# Altium PCB AX301_AX4010.PcbDoc (part 9 of 10)
Units mil, origin at the board's own origin, x right, y up, seen from the top; angles counter-clockwise.
Board outline 5185 x 3614 mil, 4 copper layers (Top Layer, GND, Mid-Layer 1, Bottom Layer); 191 components, 338 nets, 1108 pads, 420 vias.
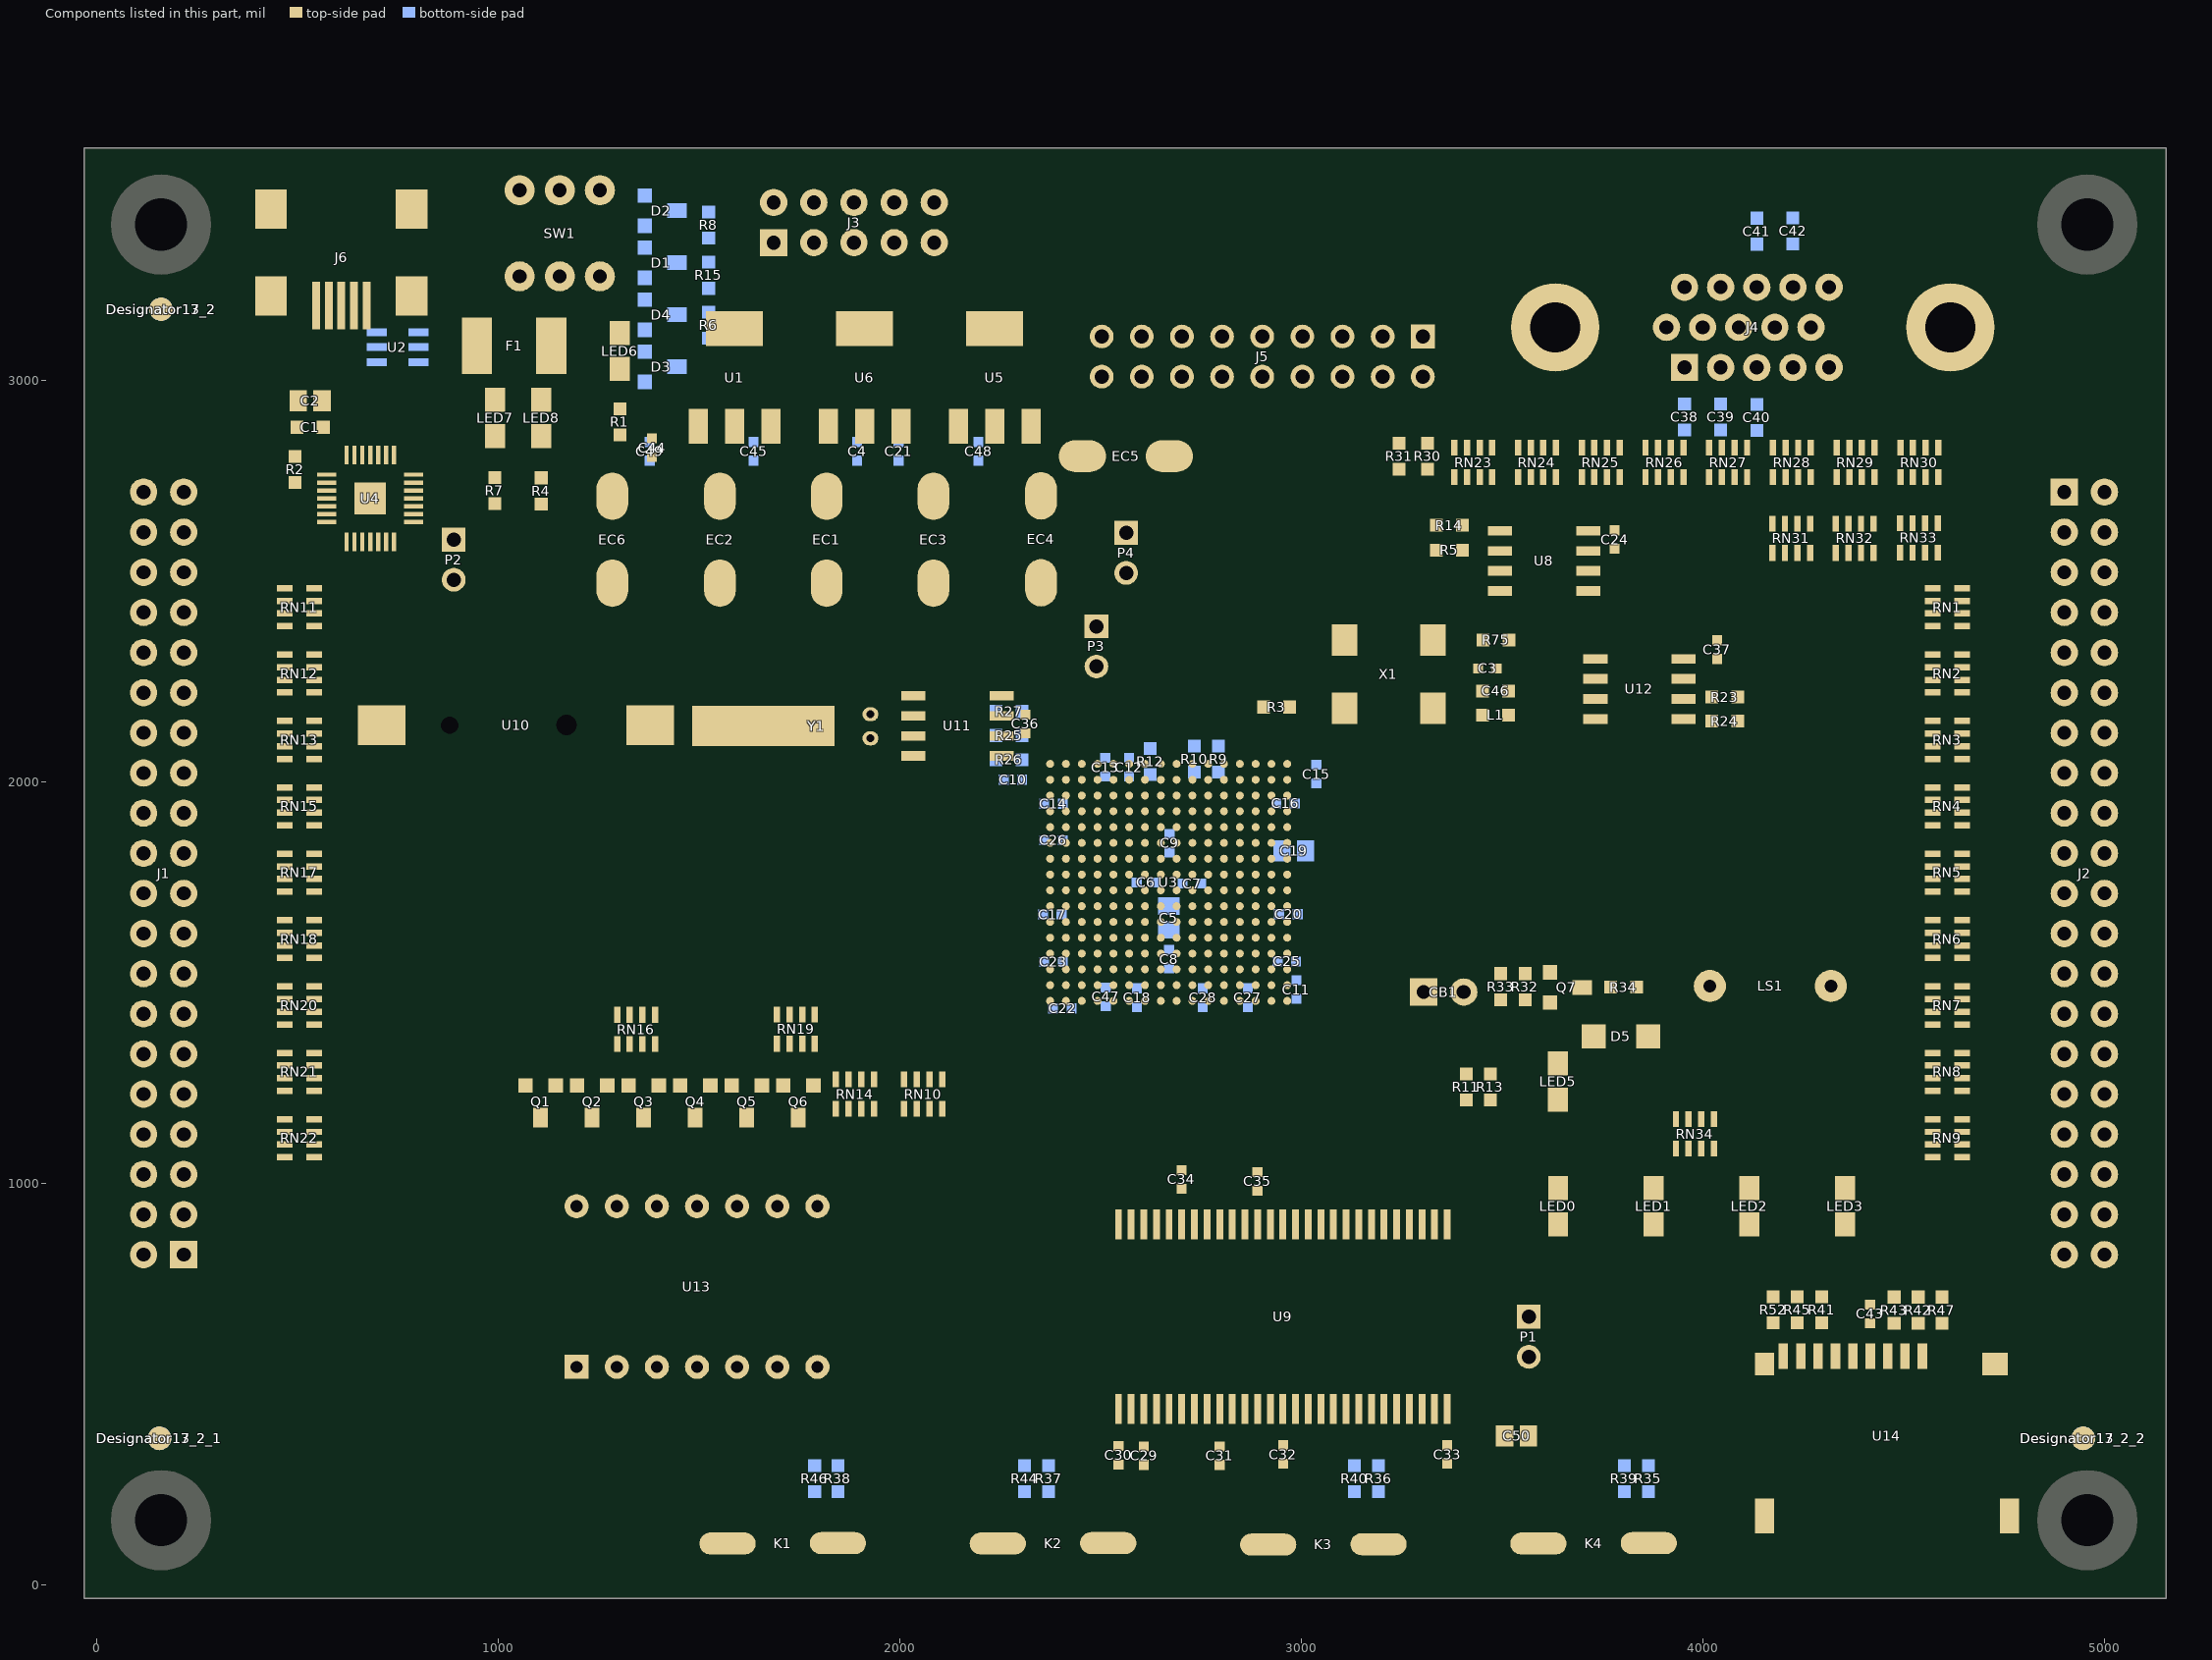
[diagram p11: the components of this part, seen from the top]

## Via types
v1: diameter 20, hole 10, Top Layer to Bottom Layer, 377 vias
v2: diameter 30, hole 15, Top Layer to Bottom Layer, 41 vias
v3: diameter 40, hole 20, Top Layer to Bottom Layer, 2 vias

## Nets (pads, with @x,y where several pads share a name; then routed paths per layer and width w, separated by ;. In a path a pad name is that pad's centre, name@x,y a point inside that pad or via, vN(x,y) a via of type N, cw(c..) or ccw(c..) an arc to the next point about the centre after c; other vN are vias at no path point) (continued)
copper on no net: (continued)
  Top Layer w0.65: 331.6,17.15 1332.82,17.15 ; 331.6,17.8 1332.82,17.8 ; 331.6,18.45 1332.82,18.45 ; 331.6,19.1 1332.82,19.1 ; 331.6,19.75 1332.82,19.75 ; 331.6,20.4 1332.82,20.4 ; 331.6,21.05 1332.82,21.05 ; 331.6,21.7 1332.82,21.7 ; 331.6,22.35 1332.82,22.35 ; 331.6,23 1332.82,23 ; 331.6,23.65 1332.82,23.65 ; 331.6,24.3 1332.82,24.3 ; 331.6,24.95 1332.82,24.95 ; 331.6,25.6 1332.82,25.6 ; 331.6,26.25 1332.82,26.25 ; 331.6,26.9 1332.82,26.9 ; 331.6,27.55 1332.82,27.55 ; 331.6,28.2 1332.82,28.2 ; 331.6,28.85 1332.82,28.85 ; 331.6,29.5 1332.82,29.5 ; 331.6,30.15 1332.82,30.15 ; 331.6,30.8 1332.82,30.8 ; 331.6,31.45 1332.82,31.45 ; 331.6,32.1 1332.82,32.1 ; 331.6,32.75 1332.82,32.75 ; 331.6,33.4 1332.82,33.4 ; 331.6,34.05 1332.82,34.05 ; 331.6,34.7 1332.82,34.7 ; 331.6,35.35 1332.82,35.35 ; 331.6,36 1332.82,36 ; 331.6,36.65 1332.82,36.65 ; 331.6,37.3 1332.82,37.3 ; 331.6,37.95 1332.82,37.95 ; 331.6,38.6 1332.82,38.6 ; 331.6,39.25 1332.82,39.25 ; 331.6,39.9 1332.82,39.9 ; 331.6,40.55 1332.82,40.55 ; 331.6,41.2 1332.82,41.2 ; 331.6,41.85 1332.82,41.85 ; 331.6,42.5 1332.82,42.5 ; 331.6,43.15 1332.82,43.15 ; 331.6,43.8 1332.82,43.8 ; 331.6,44.45 1332.82,44.45 ; 331.6,45.1 1332.82,45.1 ; 331.6,45.75 1332.82,45.75 ; 331.6,46.4 1332.82,46.4 ; 331.6,47.05 1332.82,47.05 ; 331.6,47.7 1332.82,47.7 ; 331.6,48.35 1332.82,48.35 ; 331.6,49 1332.82,49 ; 331.6,49.65 1332.82,49.65 ; 331.6,50.3 1332.82,50.3 ; 331.6,50.95 361.72,50.95 ; 331.6,51.6 361.72,51.6 ; 331.6,52.25 362.37,52.25 ; 331.6,52.9 362.37,52.9 ; 331.6,53.55 363.02,53.55 ; 331.6,54.2 363.02,54.2 ; 331.6,54.85 363.67,54.85 ; 331.6,55.5 363.67,55.5 ; 331.6,56.15 364.32,56.15 ; 331.6,56.8 364.32,56.8 ; 331.6,57.45 364.97,57.45 ; 331.6,58.1 364.97,58.1 ; 331.6,58.75 365.62,58.75 ; 331.6,59.4 366.27,59.4 ; 331.6,60.05 366.27,60.05 ; 331.6,60.7 366.92,60.7 ; 331.6,61.35 366.92,61.35 ; 331.6,62 367.57,62 ; 331.6,62.65 368.22,62.65 ; 331.6,63.3 368.22,63.3 ; 331.6,63.95 368.87,63.95 ; 331.6,64.6 368.87,64.6 ; 331.6,65.25 369.52,65.25 ; 331.6,65.9 370.17,65.9 ; 331.6,66.55 370.17,66.55 ; 331.6,67.2 370.82,67.2 ; 331.6,67.85 371.47,67.85 ; 331.6,68.5 371.47,68.5 ; 331.6,69.15 372.12,69.15 ; 331.6,69.8 372.77,69.8 ; 331.6,70.45 372.77,70.45 ; 331.6,71.1 373.42,71.1 ; 331.6,71.75 374.07,71.75 ; 331.6,72.4 374.72,72.4 ; 331.6,73.05 374.72,73.05 ; 331.6,73.7 375.37,73.7 ; 331.6,74.35 376.02,74.35 ; 331.6,75 376.67,75 ; 331.6,75.65 376.67,75.65 ; 331.6,76.3 377.32,76.3 ; 331.6,76.95 377.97,76.95 ; 331.6,77.6 378.62,77.6 ; 331.6,78.25 379.27,78.25 ; 331.6,78.9 379.27,78.9 ; 331.6,79.55 379.92,79.55 ; 331.6,80.2 380.57,80.2 ; 331.6,80.85 381.22,80.85 ; 331.6,81.5 381.87,81.5 ; 331.6,82.15 382.52,82.15 ; 331.6,82.8 383.17,82.8 ; 331.6,83.45 383.17,83.45 ; 331.6,84.1 383.82,84.1 ; 331.6,84.75 384.47,84.75 ; 331.6,85.4 385.12,85.4 ; 331.6,86.05 385.77,86.05 ; 331.6,86.7 386.42,86.7 ; 331.6,87.35 387.07,87.35 ; 331.6,88 387.72,88 ; 331.6,88.65 388.37,88.65 ; 331.6,89.3 389.02,89.3 ; 331.6,89.95 389.67,89.95 ; 331.6,90.6 390.32,90.6 ; 331.6,91.25 390.97,91.25 ; 331.6,91.9 391.62,91.9 ; 331.6,92.55 392.27,92.55 ; 331.6,93.2 392.92,93.2 ; 331.6,93.85 393.57,93.85 ; 331.6,94.5 394.22,94.5 ; 331.6,95.15 395.52,95.15 ; 331.6,95.8 396.17,95.8 ; 331.6,96.45 396.82,96.45 ; 331.6,97.1 397.47,97.1 ; 331.6,97.75 398.12,97.75 ; 331.6,98.4 399.42,98.4 ; 331.6,99.05 400.07,99.05 ; 331.6,99.7 400.72,99.7 ; 331.6,100.35 401.37,100.35 ; 331.6,101 402.02,101 ; 331.6,101.65 403.32,101.65 ; 331.6,102.3 403.97,102.3 ; 331.6,102.95 405.27,102.95 ; 331.6,103.6 405.92,103.6 ; 331.6,104.25 392.27,104.25 ; 331.6,104.9 392.92,104.9 ; 331.6,105.55 392.92,105.55 ; 331.6,106.2 393.57,106.2 ; 331.6,106.85 394.22,106.85 ; 331.6,107.5 394.22,107.5 ; 331.6,108.15 394.87,108.15 ; 331.6,108.8 394.87,108.8 ; 331.6,109.45 395.52,109.45 ; 331.6,110.1 395.52,110.1 ; 331.6,110.75 396.17,110.75 ; 331.6,111.4 396.17,111.4 ; 331.6,112.05 396.82,112.05 ; 331.6,112.7 397.47,112.7 ; 331.6,113.35 397.47,113.35 ; 331.6,114 398.12,114 ; 331.6,114.65 398.12,114.65 ; 331.6,115.3 398.77,115.3 ; 331.6,115.95 398.77,115.95 ; 331.6,116.6 399.42,116.6 ; 331.6,117.25 400.07,117.25 ; 331.6,117.9 400.07,117.9 ; 331.6,118.55 400.72,118.55 ; 331.6,119.2 400.72,119.2 ; 331.6,119.85 401.37,119.85 ; 331.6,120.5 401.37,120.5 ; 331.6,121.15 402.02,121.15 ; 331.6,121.8 402.67,121.8 ; 331.6,122.45 402.67,122.45 ; 331.6,123.1 403.32,123.1 ; 331.6,123.75 403.32,123.75 ; 331.6,124.4 403.97,124.4 ; 331.6,125.05 403.97,125.05 ; 331.6,125.7 404.62,125.7 ; 331.6,126.35 404.62,126.35 ; 331.6,127 405.27,127 ; 331.6,127.65 405.92,127.65 ; 331.6,128.3 405.92,128.3 ; 331.6,128.95 406.57,128.95 ; 331.6,129.6 406.57,129.6 ; 331.6,130.25 407.22,130.25 ; 331.6,130.9 407.22,130.9 ; 331.6,131.55 407.87,131.55 ; 331.6,132.2 408.52,132.2 ; 331.6,132.85 408.52,132.85 ; 331.6,133.5 409.17,133.5 ; 331.6,134.15 409.17,134.15 ; 331.6,134.8 409.82,134.8 ; 331.6,135.45 409.82,135.45 ; 331.6,136.1 410.47,136.1 ; 331.6,136.75 411.12,136.75 ; 331.6,137.4 411.12,137.4 ; 331.6,138.05 411.77,138.05 ; 331.6,138.7 411.77,138.7 ; 331.6,139.35 412.42,139.35 ; 331.6,140 412.42,140 ; 331.6,140.65 413.07,140.65 ; 331.6,141.3 413.72,141.3 ; 331.6,141.95 413.72,141.95 ; 331.6,142.6 414.37,142.6 ; 331.6,143.25 414.37,143.25 ; 331.6,143.9 415.02,143.9 ; 331.6,144.55 415.02,144.55 ; 331.6,145.2 415.67,145.2 ; 331.6,145.85 415.67,145.85 ; 331.6,146.5 416.32,146.5 ; 331.6,147.15 416.97,147.15 ; 331.6,147.8 416.97,147.8 ; 331.6,148.45 417.62,148.45 ; 331.6,149.1 417.62,149.1 ; 331.6,149.75 418.27,149.75 ; 331.6,150.4 418.27,150.4 ; 331.6,151.05 418.92,151.05 ; 331.6,151.7 419.57,151.7 ; 331.6,152.35 419.57,152.35 ; 331.6,153 420.22,153 ; 331.6,153.65 420.22,153.65 ; 331.6,154.3 420.87,154.3 ; 331.6,154.95 420.87,154.95 ; 331.6,155.6 421.52,155.6 ; 331.6,156.25 422.17,156.25 ; 331.6,156.9 422.17,156.9 ; 331.6,157.55 422.82,157.55 ; 331.6,158.2 422.82,158.2 ; 331.6,158.85 423.47,158.85 ; 331.6,159.5 423.47,159.5 ; 331.6,160.15 424.12,160.15 ; 331.6,160.8 424.12,160.8 ; 331.6,161.45 424.77,161.45 ; 331.6,162.1 425.42,162.1 ; 331.6,162.75 425.42,162.75 ; 331.6,163.4 426.07,163.4 ; 331.6,164.05 426.07,164.05 ; 331.6,164.7 426.72,164.7 ; 331.6,165.35 426.72,165.35 ; 331.6,166 427.37,166 ; 331.6,166.65 428.02,166.65 ; 331.6,167.3 428.02,167.3 ; 331.6,167.95 428.67,167.95 ; 331.6,168.6 428.67,168.6 ; 331.6,169.25 429.32,169.25 ; 331.6,169.9 429.32,169.9 ; 331.6,170.55 429.97,170.55 ; 331.6,171.2 430.62,171.2 ; 331.6,171.85 430.62,171.85 ; 331.6,172.5 431.27,172.5 ; 331.6,173.15 431.27,173.15 ; 331.6,173.8 431.92,173.8 ; 331.6,174.45 431.92,174.45 ; 331.6,175.1 432.57,175.1 ; 331.6,175.75 432.57,175.75 ; 331.6,176.4 433.22,176.4 ; 331.6,177.05 433.87,177.05 ; 331.6,177.7 433.87,177.7 ; 331.6,178.35 434.52,178.35 ; 331.6,179 434.52,179 ; 331.6,179.65 435.17,179.65 ; 331.6,180.3 435.17,180.3 ; 331.6,180.95 435.82,180.95 ; 331.6,181.6 436.47,181.6 ; 331.6,182.25 436.47,182.25 ; 331.6,182.9 437.12,182.9 ; 331.6,183.55 437.12,183.55 ; 331.6,184.2 437.77,184.2 ; 331.6,184.85 437.77,184.85 ; 331.6,185.5 438.42,185.5 ; 331.6,186.15 439.07,186.15 ; 331.6,186.8 439.07,186.8 ; 331.6,187.45 439.72,187.45 ; 331.6,188.1 439.72,188.1 ; 331.6,188.75 440.37,188.75 ; 331.6,189.4 440.37,189.4 ; 331.6,190.05 441.02,190.05 ; 331.6,190.7 441.67,190.7 ; 331.6,191.35 441.67,191.35 ; 331.6,192 442.32,192 ; 331.6,192.65 442.32,192.65 ; 331.6,193.3 442.97,193.3 ; 331.6,193.95 442.97,193.95 ; 331.6,194.6 443.62,194.6 ; 331.6,195.25 443.62,195.25 ; 331.6,195.9 444.27,195.9 ; 331.6,196.55 444.92,196.55 ; 331.6,197.2 444.92,197.2 ; 331.6,197.85 445.57,197.85 ; 331.6,198.5 445.57,198.5 ; 331.6,199.15 446.22,199.15 ; 331.6,199.8 446.22,199.8 ; 331.6,200.45 446.87,200.45 ; 331.6,201.1 447.52,201.1 ; 331.6,201.75 447.52,201.75 ; 331.6,202.4 448.17,202.4 ; 331.6,203.05 448.17,203.05 ; 331.6,203.7 448.82,203.7 ; 331.6,204.35 448.82,204.35 ; 331.6,205 449.47,205 ; 331.6,205.65 450.12,205.65 ; 331.6,206.3 450.12,206.3 ; 331.6,206.95 450.77,206.95 ; 331.6,207.6 450.77,207.6 ; 331.6,208.25 451.42,208.25 ; 331.6,208.9 451.42,208.9 ; 331.6,209.55 452.07,209.55 ; 331.6,210.2 452.07,210.2 ; 331.6,210.85 452.72,210.85 ; 331.6,211.5 453.37,211.5 ; 331.6,212.15 453.37,212.15 ; 331.6,212.8 454.02,212.8 ; 331.6,213.45 454.02,213.45 ; 331.6,214.1 454.67,214.1 ; 331.6,214.75 454.67,214.75 ; 331.6,215.4 455.32,215.4 ; 331.6,216.05 455.97,216.05 ; 331.6,216.7 455.97,216.7 ; 331.6,217.35 456.62,217.35 ; 331.6,218 456.62,218 ; 331.6,218.65 457.27,218.65 ; 331.6,219.3 457.27,219.3 ; 331.6,219.95 457.92,219.95 ; 331.6,220.6 458.57,220.6 ; 331.6,221.25 458.57,221.25 ; 331.6,221.9 459.22,221.9 ; 331.6,222.55 459.22,222.55 ; 331.6,223.2 459.87,223.2 ; 331.6,223.85 1332.82,223.85 ; 331.6,224.5 1332.82,224.5 ; 331.6,225.15 1332.82,225.15 ; 331.6,225.8 1332.82,225.8 ; 331.6,226.45 1332.82,226.45 ; 331.6,227.1 1332.82,227.1 ; 331.6,227.75 1332.82,227.75 ; 331.6,228.4 1332.82,228.4 ; 331.6,229.05 1332.82,229.05 ; 331.6,229.7 1332.82,229.7 ; 331.6,230.35 1332.82,230.35 ; 331.6,231 1332.82,231 ; 331.6,231.65 1332.82,231.65 ; 331.6,232.3 1332.82,232.3 ; 331.6,232.95 1332.82,232.95 ; 331.6,233.6 1332.82,233.6 ; 331.6,234.25 1332.82,234.25 ; 331.6,234.9 1332.82,234.9 ; 331.6,235.55 1332.82,235.55 ; 331.6,236.2 1332.82,236.2 ; 331.6,236.85 1332.82,236.85 ; 331.6,237.5 1332.82,237.5 ; 331.6,238.15 1332.82,238.15 ; 331.6,238.8 1332.82,238.8 ; 331.6,239.45 1332.82,239.45 ; 331.6,240.1 1332.82,240.1 ; 331.6,240.75 1332.82,240.75 ; 331.6,241.4 1332.82,241.4 ; 331.6,242.05 1332.82,242.05 ; 331.6,242.7 1332.82,242.7 ; 331.6,243.35 1332.82,243.35 ; 331.6,244 1332.82,244 ; 331.6,244.65 1332.82,244.65 ; 331.6,245.3 1332.82,245.3 ; 331.6,245.95 1332.82,245.95 ; 331.6,246.6 1332.82,246.6 ; 331.6,247.25 1332.82,247.25 ; 331.6,247.9 1332.82,247.9 ; 393.35,104.25 406.57,104.25 ; 394.65,104.9 407.87,104.9 ; 395.3,105.55 408.52,105.55 ; 395.95,106.2 409.17,106.2 ; 396.6,106.85 410.47,106.85 ; 397.25,107.5 411.77,107.5 ; 397.9,108.15 412.42,108.15 ; 399.2,108.8 413.72,108.8 ; 399.85,109.45 414.37,109.45 ; 400.5,110.1 415.67,110.1 ; 401.15,110.75 416.32,110.75 ; 401.8,111.4 417.62,111.4 ; 403.1,112.05 418.92,112.05 ; 403.75,112.7 420.22,112.7 ; 404.4,113.35 420.87,113.35 ; 405.7,114 422.17,114 ; 406.35,114.65 423.47,114.65 ; 407,115.3 424.77,115.3 ; 408.3,115.95 426.07,115.95 ; 408.95,116.6 427.37,116.6 ; 410.25,117.25 428.67,117.25 ; 410.9,117.9 429.97,117.9 ; 412.2,118.55 431.27,118.55 ; 412.85,119.2 432.57,119.2 ; 414.15,119.85 434.52,119.85 ; 415.45,120.5 435.82,120.5 ; 416.1,121.15 437.77,121.15 ; 417.4,121.8 439.07,121.8 ; 418.7,122.45 441.02,122.45 ; 419.35,123.1 442.97,123.1 ; 420.65,123.75 444.92,123.75 ; 421.3,50.95 491.72,50.95 ; 421.95,51.6 491.72,51.6 ; 421.95,52.25 491.72,52.25 ; 421.95,124.4 446.87,124.4 ; 422.6,52.9 491.72,52.9 ; 423.25,53.55 491.72,53.55 ; 423.25,54.2 491.72,54.2 ; 423.25,125.05 448.82,125.05 ; 423.9,54.85 491.72,54.85 ; 424.55,55.5 491.72,55.5 ; 424.55,56.15 491.72,56.15 ; 424.55,125.7 450.77,125.7 ; 425.2,56.8 491.72,56.8 ; 425.85,57.45 491.72,57.45 ; 425.85,58.1 491.07,58.1 ; 425.85,126.35 453.37,126.35 ; 426.5,58.75 491.07,58.75 ; 427.15,59.4 491.07,59.4 ; 427.15,60.05 491.07,60.05 ; 427.15,127 455.97,127 ; 427.8,60.7 491.07,60.7 ; 428.45,61.35 491.07,61.35 ; 428.45,127.65 458.57,127.65 ; 429.1,62 491.07,62 ; 429.1,62.65 491.07,62.65 ; 429.75,63.3 491.07,63.3 ; 429.75,128.3 461.82,128.3 ; 430.4,63.95 491.07,63.95 ; 431.05,64.6 491.07,64.6 ; 431.05,128.95 465.07,128.95 ; 431.7,65.25 490.42,65.25 ; 431.7,65.9 490.42,65.9 ; 432.35,66.55 490.42,66.55 ; 432.35,129.6 468.97,129.6 ; 433,67.2 490.42,67.2 ; 433.65,67.85 490.42,67.85 ; 433.65,130.25 474.17,130.25 ; 434.3,68.5 490.42,68.5 ; 434.95,69.15 490.42,69.15 ; 435.6,69.8 490.42,69.8 ; 435.6,130.9 485.22,130.9 ; 436.25,70.45 490.42,70.45 ; 436.9,71.1 490.42,71.1 ; 437.55,71.75 490.42,71.75 ; 437.55,131.55 485.22,131.55 ; 438.2,72.4 490.42,72.4 ; 438.85,73.05 489.77,73.05 ; 438.85,132.2 485.22,132.2 ; 439.5,73.7 489.77,73.7 ; 440.15,74.35 489.77,74.35 ; 440.8,75 489.77,75 ; 440.8,132.85 484.57,132.85 ; 441.45,75.65 489.77,75.65 ; 442.1,76.3 489.77,76.3 ; 442.75,76.95 489.77,76.95 ; 442.75,133.5 484.57,133.5 ; 443.4,77.6 489.77,77.6 ; 444.7,78.25 489.77,78.25 ; 444.7,134.15 484.57,134.15 ; 445.35,78.9 489.77,78.9 ; 446,79.55 489.77,79.55 ; 446.65,80.2 489.12,80.2 ; 446.65,134.8 484.57,134.8 ; 447.3,80.85 489.12,80.85 ; 448.6,81.5 489.12,81.5 ; 448.6,135.45 484.57,135.45 ; 449.25,82.15 489.12,82.15 ; 450.55,82.8 489.12,82.8 ; 451.2,83.45 489.12,83.45 ; 451.2,136.1 484.57,136.1 ; 451.85,84.1 489.12,84.1 ; 453.15,84.75 489.12,84.75 ; 453.15,136.75 484.57,136.75 ; 453.8,85.4 489.12,85.4 ; 455.1,86.05 489.12,86.05 ; 455.75,86.7 489.12,86.7 ; 456.4,137.4 484.57,137.4 ; 457.05,87.35 488.47,87.35 ; 458.35,88 488.47,88 ; 459,88.65 488.47,88.65 ; 459,138.05 484.57,138.05 ; 460.3,89.3 488.47,89.3 ; 461.6,89.95 488.47,89.95 ; 461.6,138.7 484.57,138.7 ; 462.25,90.6 488.47,90.6 ; 462.9,139.35 484.57,139.35 ; 463.55,91.25 488.47,91.25 ; 463.55,140 483.92,140 ; 463.55,140.65 483.92,140.65 ; 464.2,141.3 483.92,141.3 ; 464.2,141.95 483.92,141.95 ; 464.85,91.9 488.47,91.9 ; 464.85,142.6 483.92,142.6 ; 464.85,143.25 483.92,143.25 ; 465.5,143.9 483.92,143.9 ; 465.5,144.55 483.92,144.55 ; 465.5,145.2 483.92,145.2 ; 466.15,92.55 488.47,92.55 ; 466.15,145.85 483.92,145.85 ; 466.15,146.5 483.92,146.5 ; 466.8,147.15 483.92,147.15 ; 466.8,147.8 483.27,147.8 ; 467.45,93.2 488.47,93.2 ; 467.45,148.45 483.27,148.45 ; 467.45,149.1 483.27,149.1 ; 468.1,149.75 483.27,149.75 ; 468.1,150.4 483.27,150.4 ; 468.75,93.85 488.47,93.85 ; 468.75,151.05 483.27,151.05 ; 468.75,151.7 483.27,151.7 ; 469.4,152.35 483.27,152.35 ; 469.4,153 483.27,153 ; 470.05,94.5 488.47,94.5 ; 470.05,153.65 483.27,153.65 ; 470.05,154.3 483.27,154.3 ; 470.7,154.95 483.27,154.95 ; 470.7,155.6 482.62,155.6 ; 470.7,156.25 482.62,156.25 ; 471.35,95.15 487.82,95.15 ; 471.35,156.9 482.62,156.9 ; 471.35,157.55 482.62,157.55 ; 472,158.2 482.62,158.2 ; 472,158.85 482.62,158.85 ; 472.65,159.5 482.62,159.5 ; 472.65,160.15 482.62,160.15 ; 473.3,95.8 487.82,95.8 ; 473.3,160.8 482.62,160.8 ; 473.3,161.45 482.62,161.45 ; 473.95,162.1 482.62,162.1 ; 473.95,162.75 482.62,162.75 ; 474.6,163.4 481.97,163.4 ; 474.6,164.05 481.97,164.05 ; 475.25,96.45 487.82,96.45 ; 475.25,164.7 481.97,164.7 ; 475.25,165.35 481.97,165.35 ; 475.9,166 481.97,166 ; 475.9,166.65 481.97,166.65 ; 476.55,97.1 487.82,97.1 ; 476.55,167.3 481.97,167.3 ; 476.55,167.95 481.97,167.95 ; 476.55,168.6 481.97,168.6 ; 477.2,169.25 481.97,169.25 ; 477.2,169.9 481.97,169.9 ; 477.85,170.55 481.97,170.55 ; 477.85,171.2 481.32,171.2 ; 478.5,97.75 487.82,97.75 ; 478.5,171.85 481.32,171.85 ; 478.5,172.5 481.32,172.5 ; 479.15,173.15 481.32,173.15 ; 479.15,173.8 481.32,173.8 ; 479.8,126.35 485.22,126.35 ; 479.8,127 485.22,127 ; 479.8,127.65 485.22,127.65 ; 479.8,128.3 485.22,128.3 ; 479.8,128.95 485.22,128.95 ; 479.8,129.6 485.22,129.6 ; 479.8,130.25 485.22,130.25 ; 479.8,174.45 481.32,174.45 ; 479.8,175.1 481.32,175.1 ; 480.45,98.4 487.82,98.4 ; 480.45,117.9 485.87,117.9 ; 480.45,118.55 485.87,118.55 ; 480.45,119.2 485.87,119.2 ; 480.45,119.85 485.87,119.85 ; 480.45,120.5 485.87,120.5 ; 480.45,121.15 485.87,121.15 ; 480.45,121.8 485.87,121.8 ; 480.45,122.45 485.87,122.45 ; 480.45,123.1 485.87,123.1 ; 480.45,123.75 485.87,123.75 ; 480.45,124.4 485.87,124.4 ; 480.45,125.05 485.22,125.05 ; 480.45,125.7 485.22,125.7 ; 480.45,175.75 481.32,175.75 ; 480.45,176.4 481.32,176.4 ; 481.1,109.45 487.17,109.45 ; 481.1,110.1 486.52,110.1 ; 481.1,110.75 486.52,110.75 ; 481.1,111.4 486.52,111.4 ; 481.1,112.05 486.52,112.05 ; 481.1,112.7 486.52,112.7 ; 481.1,113.35 486.52,113.35 ; 481.1,114 486.52,114 ; 481.1,114.65 486.52,114.65 ; 481.1,115.3 486.52,115.3 ; 481.1,115.95 486.52,115.95 ; 481.1,116.6 486.52,116.6 ; 481.1,117.25 485.87,117.25 ; 481.1,177.05 481.32,177.05 ; 481.1,177.7 481.32,177.7 ; 481.75,100.35 487.82,100.35 ; 481.75,101 487.82,101 ; 481.75,101.65 487.82,101.65 ; 481.75,102.3 487.17,102.3 ; 481.75,102.95 487.17,102.95 ; 481.75,103.6 487.17,103.6 ; 481.75,104.25 487.17,104.25 ; 481.75,104.9 487.17,104.9 ; 481.75,105.55 487.17,105.55 ; 481.75,106.2 487.17,106.2 ; 481.75,106.85 487.17,106.85 ; 481.75,107.5 487.17,107.5 ; 481.75,108.15 487.17,108.15 ; 481.75,108.8 487.17,108.8 ; 482.4,99.05 487.82,99.05 ; 482.4,99.7 487.82,99.7 ; 518.15,221.25 616.52,221.25 ; 518.15,221.9 616.52,221.9 ; 518.15,222.55 616.52,222.55 ; 518.15,223.2 617.17,223.2 ; 518.8,217.35 615.87,217.35 ; 518.8,218 615.87,218 ; 518.8,218.65 615.87,218.65 ; 518.8,219.3 615.87,219.3 ; 518.8,219.95 616.52,219.95 ; 518.8,220.6 616.52,220.6 ; 519.45,212.8 614.57,212.8 ; 519.45,213.45 614.57,213.45 ; 519.45,214.1 615.22,214.1 ; 519.45,214.75 615.22,214.75 ; 519.45,215.4 615.22,215.4 ; 519.45,216.05 615.22,216.05 ; 519.45,216.7 615.22,216.7 ; 520.1,208.9 613.92,208.9 ; 520.1,209.55 613.92,209.55 ; 520.1,210.2 613.92,210.2 ; 520.1,210.85 614.57,210.85 ; 520.1,211.5 614.57,211.5 ; 520.1,212.15 614.57,212.15 ; 520.75,205 613.27,205 ; 520.75,205.65 613.27,205.65 ; 520.75,206.3 613.27,206.3 ; 520.75,206.95 613.27,206.95 ; 520.75,207.6 613.27,207.6 ; 520.75,208.25 613.92,208.25 ; 521.4,201.1 611.97,201.1 ; 521.4,201.75 612.62,201.75 ; 521.4,202.4 612.62,202.4 ; 521.4,203.05 612.62,203.05 ; 521.4,203.7 612.62,203.7 ; 521.4,204.35 612.62,204.35 ; 522.05,196.55 611.32,196.55 ; 522.05,197.2 611.32,197.2 ; 522.05,197.85 611.32,197.85 ; 522.05,198.5 611.32,198.5 ; 522.05,199.15 611.97,199.15 ; 522.05,199.8 611.97,199.8 ; 522.05,200.45 611.97,200.45 ; 522.7,192.65 610.67,192.65 ; 522.7,193.3 610.67,193.3 ; 522.7,193.95 610.67,193.95 ; 522.7,194.6 610.67,194.6 ; 522.7,195.25 610.67,195.25 ; 522.7,195.9 611.32,195.9 ; 523.35,188.75 609.37,188.75 ; 523.35,189.4 610.02,189.4 ; 523.35,190.05 610.02,190.05 ; 523.35,190.7 610.02,190.7 ; 523.35,191.35 610.02,191.35 ; 523.35,192 610.02,192 ; 524,184.2 608.72,184.2 ; 524,184.85 608.72,184.85 ; 524,185.5 608.72,185.5 ; 524,186.15 608.72,186.15 ; 524,186.8 609.37,186.8 ; 524,187.45 609.37,187.45 ; 524,188.1 609.37,188.1 ; 524.65,180.3 608.07,180.3 ; 524.65,180.95 608.07,180.95 ; 524.65,181.6 608.07,181.6 ; 524.65,182.25 608.07,182.25 ; 524.65,182.9 608.07,182.9 ; 524.65,183.55 608.72,183.55 ; 525.3,176.4 606.77,176.4 ; 525.3,177.05 606.77,177.05 ; 525.3,177.7 607.42,177.7 ; 525.3,178.35 607.42,178.35 ; 525.3,179 607.42,179 ; 525.3,179.65 607.42,179.65 ; 525.95,172.5 606.12,172.5 ; 525.95,173.15 606.12,173.15 ; 525.95,173.8 606.12,173.8 ; 525.95,174.45 606.77,174.45 ; 525.95,175.1 606.77,175.1 ; 525.95,175.75 606.77,175.75 ; 526.6,167.95 605.47,167.95 ; 526.6,168.6 605.47,168.6 ; 526.6,169.25 605.47,169.25 ; 526.6,169.9 605.47,169.9 ; 526.6,170.55 605.47,170.55 ; 526.6,171.2 606.12,171.2 ; 526.6,171.85 606.12,171.85 ; 527.25,164.05 604.17,164.05 ; 527.25,164.7 604.17,164.7 ; 527.25,165.35 604.82,165.35 ; 527.25,166 604.82,166 ; 527.25,166.65 604.82,166.65 ; 527.25,167.3 604.82,167.3 ; 527.9,160.15 603.52,160.15 ; 527.9,160.8 603.52,160.8 ; 527.9,161.45 603.52,161.45 ; 527.9,162.1 604.17,162.1 ; 527.9,162.75 604.17,162.75 ; 527.9,163.4 604.17,163.4 ; 528.55,156.25 602.87,156.25 ; 528.55,156.9 602.87,156.9 ; 528.55,157.55 602.87,157.55 ; 528.55,158.2 602.87,158.2 ; 528.55,158.85 603.52,158.85 ; 528.55,159.5 603.52,159.5 ; 529.2,151.7 601.57,151.7 ; 529.2,152.35 601.57,152.35 ; 529.2,153 602.22,153 ; 529.2,153.65 602.22,153.65 ; 529.2,154.3 602.22,154.3 ; 529.2,154.95 602.22,154.95 ; 529.2,155.6 602.22,155.6 ; 529.85,147.8 600.92,147.8 ; 529.85,148.45 600.92,148.45 ; 529.85,149.1 600.92,149.1 ; 529.85,149.75 601.57,149.75 ; 529.85,150.4 601.57,150.4 ; 529.85,151.05 601.57,151.05 ; 530.5,143.9 600.27,143.9 ; 530.5,144.55 600.27,144.55 ; 530.5,145.2 600.27,145.2 ; 530.5,145.85 600.27,145.85 ; 530.5,146.5 600.27,146.5 ; 530.5,147.15 600.92,147.15 ; 531.15,139.35 598.97,139.35 ; 531.15,140 598.97,140 ; 531.15,140.65 599.62,140.65 ; 531.15,141.3 599.62,141.3 ; 531.15,141.95 599.62,141.95 ; 531.15,142.6 599.62,142.6 ; 531.15,143.25 599.62,143.25 ; 531.8,135.45 598.32,135.45 ; 531.8,136.1 598.32,136.1 ; 531.8,136.75 598.32,136.75 ; 531.8,137.4 598.97,137.4 ; 531.8,138.05 598.97,138.05 ; 531.8,138.7 598.97,138.7 ; 532.45,131.55 597.67,131.55 ; 532.45,132.2 597.67,132.2 ; 532.45,132.85 597.67,132.85 ; 532.45,133.5 597.67,133.5 ; 532.45,134.15 597.67,134.15 ; 532.45,134.8 598.32,134.8 ; 533.1,127.65 596.37,127.65 ; 533.1,128.3 597.02,128.3 ; 533.1,128.95 597.02,128.95 ; 533.1,129.6 597.02,129.6 ; 533.1,130.25 597.02,130.25 ; 533.1,130.9 597.02,130.9 ; 533.75,123.1 595.72,123.1 ; 533.75,123.75 595.72,123.75 ; 533.75,124.4 595.72,124.4 ; 533.75,125.05 595.72,125.05 ; 533.75,125.7 596.37,125.7 ; 533.75,126.35 596.37,126.35 ; 533.75,127 596.37,127 ; 534.4,119.2 595.07,119.2 ; 534.4,119.85 595.07,119.85 ; 534.4,120.5 595.07,120.5 ; 534.4,121.15 595.07,121.15 ; 534.4,121.8 595.07,121.8 ; 534.4,122.45 595.72,122.45 ; 535.05,115.3 593.77,115.3 ; 535.05,115.95 594.42,115.95 ; 535.05,116.6 594.42,116.6 ; 535.05,117.25 594.42,117.25 ; 535.05,117.9 594.42,117.9 ; 535.05,118.55 594.42,118.55 ; 535.7,110.75 593.12,110.75 ; 535.7,111.4 593.12,111.4 ; 535.7,112.05 593.12,112.05 ; 535.7,112.7 593.12,112.7 ; 535.7,113.35 593.77,113.35 ; 535.7,114 593.77,114 ; 535.7,114.65 593.77,114.65 ; 536.35,106.85 592.47,106.85 ; 536.35,107.5 592.47,107.5 ; 536.35,108.15 592.47,108.15 ; 536.35,108.8 592.47,108.8 ; 536.35,109.45 592.47,109.45 ; 536.35,110.1 593.12,110.1 ; 537,102.95 591.17,102.95 ; 537,103.6 591.17,103.6 ; 537,104.25 591.82,104.25 ; 537,104.9 591.82,104.9 ; 537,105.55 591.82,105.55 ; 537,106.2 591.82,106.2 ; 537.65,99.05 590.52,99.05 ; 537.65,99.7 590.52,99.7 ; 537.65,100.35 590.52,100.35 ; 537.65,101 591.17,101 ; 537.65,101.65 591.17,101.65 ; 537.65,102.3 591.17,102.3 ; 538.3,94.5 589.87,94.5 ; 538.3,95.15 589.87,95.15 ; 538.3,95.8 589.87,95.8 ; 538.3,96.45 589.87,96.45 ; 538.3,97.1 589.87,97.1 ; 538.3,97.75 590.52,97.75 ; 538.3,98.4 590.52,98.4 ; 538.95,90.6 588.57,90.6 ; 538.95,91.25 588.57,91.25 ; 538.95,91.9 589.22,91.9 ; 538.95,92.55 589.22,92.55 ; 538.95,93.2 589.22,93.2 ; 538.95,93.85 589.22,93.85 ; 539.6,86.7 587.92,86.7 ; 539.6,87.35 587.92,87.35 ; 539.6,88 587.92,88 ; 539.6,88.65 588.57,88.65 ; 539.6,89.3 588.57,89.3 ; 539.6,89.95 588.57,89.95 ; 540.25,82.8 587.27,82.8 ; 540.25,83.45 587.27,83.45 ; 540.25,84.1 587.27,84.1 ; 540.25,84.75 587.27,84.75 ; 540.25,85.4 587.92,85.4 ; 540.25,86.05 587.92,86.05 ; 540.9,78.25 585.97,78.25 ; 540.9,78.9 585.97,78.9 ; 540.9,79.55 586.62,79.55 ; 540.9,80.2 586.62,80.2 ; 540.9,80.85 586.62,80.85 ; 540.9,81.5 586.62,81.5 ; 540.9,82.15 586.62,82.15 ; 541.55,74.35 585.32,74.35 ; 541.55,75 585.32,75 ; 541.55,75.65 585.32,75.65 ; 541.55,76.3 585.97,76.3 ; 541.55,76.95 585.97,76.95 ; 541.55,77.6 585.97,77.6 ; 542.2,70.45 584.67,70.45 ; 542.2,71.1 584.67,71.1 ; 542.2,71.75 584.67,71.75 ; 542.2,72.4 584.67,72.4 ; 542.2,73.05 584.67,73.05 ; 542.2,73.7 585.32,73.7 ; 542.85,65.9 583.37,65.9 ; 542.85,66.55 583.37,66.55 ; 542.85,67.2 584.02,67.2 ; 542.85,67.85 584.02,67.85 ; 542.85,68.5 584.02,68.5 ; 542.85,69.15 584.02,69.15 ; 542.85,69.8 584.02,69.8 ; 543.5,62 582.72,62 ; 543.5,62.65 582.72,62.65 ; 543.5,63.3 582.72,63.3 ; 543.5,63.95 583.37,63.95 ; 543.5,64.6 583.37,64.6 ; 543.5,65.25 583.37,65.25 ; 544.15,58.1 582.07,58.1 ; 544.15,58.75 582.07,58.75 ; 544.15,59.4 582.07,59.4 ; 544.15,60.05 582.07,60.05 ; 544.15,60.7 582.07,60.7 ; 544.15,61.35 582.72,61.35 ; 544.8,54.2 580.77,54.2 ; 544.8,54.85 581.42,54.85 ; 544.8,55.5 581.42,55.5 ; 544.8,56.15 581.42,56.15 ; 544.8,56.8 581.42,56.8 ; 544.8,57.45 581.42,57.45 ; 545.45,50.95 580.12,50.95 ; 545.45,51.6 580.12,51.6 ; 545.45,52.25 580.77,52.25 ; 545.45,52.9 580.77,52.9 ; 545.45,53.55 580.77,53.55 ; 644.25,93.2 769.27,93.2 ; 644.25,93.85 769.27,93.85 ; 644.25,94.5 769.27,94.5 ; 644.25,95.15 769.92,95.15 ; 644.25,95.8 769.92,95.8 ; 644.9,96.45 769.92,96.45 ; 644.9,97.1 769.92,97.1 ; 644.9,97.75 769.92,97.75 ; 644.9,98.4 770.57,98.4 ; 645.55,99.05 770.57,99.05 ; 645.55,99.7 770.57,99.7 ; 645.55,100.35 770.57,100.35 ; 645.55,101 770.57,101 ; 645.55,101.65 771.22,101.65 ; 646.2,102.3 771.22,102.3 ; 646.2,102.95 771.22,102.95 ; 646.2,103.6 771.22,103.6 ; 646.2,104.25 771.87,104.25 ; 646.2,104.9 771.87,104.9 ; 646.85,105.55 771.87,105.55 ; 646.85,106.2 771.87,106.2 ; 646.85,106.85 771.87,106.85 ; 646.85,107.5 772.52,107.5 ; 647.5,108.15 772.52,108.15 ; 647.5,108.8 772.52,108.8 ; 647.5,109.45 772.52,109.45 ; 647.5,110.1 772.52,110.1 ; 647.5,110.75 773.17,110.75 ; 648.15,111.4 773.17,111.4 ; 648.15,112.05 773.17,112.05 ; 648.15,112.7 773.17,112.7 ; 648.15,113.35 773.82,113.35 ; 648.15,114 773.82,114 ; 648.8,114.65 773.82,114.65 ; 648.8,115.3 773.82,115.3 ; 648.8,115.95 773.82,115.95 ; 648.8,116.6 774.47,116.6 ; 649.45,117.25 774.47,117.25 ; 649.45,117.9 774.47,117.9 ; 649.45,118.55 774.47,118.55 ; 649.45,119.2 775.12,119.2 ; 649.45,119.85 775.12,119.85 ; 650.1,120.5 775.12,120.5 ; 650.1,121.15 775.12,121.15 ; 650.1,121.8 775.12,121.8 ; 650.1,122.45 775.77,122.45 ; 650.75,123.1 775.77,123.1 ; 650.75,123.75 775.77,123.75 ; 650.75,124.4 775.77,124.4 ; 650.75,125.05 775.77,125.05 ; 650.75,125.7 776.42,125.7 ; 651.4,126.35 776.42,126.35 ; 651.4,127 776.42,127 ; 651.4,127.65 776.42,127.65 ; 651.4,128.3 777.07,128.3 ; 651.4,128.95 777.07,128.95 ; 652.05,129.6 777.07,129.6 ; 652.05,130.25 777.07,130.25 ; 652.05,130.9 777.07,130.9 ; 652.05,131.55 777.72,131.55 ; 652.7,132.2 777.72,132.2 ; 652.7,132.85 777.72,132.85 ; 652.7,133.5 777.72,133.5 ; 652.7,134.15 777.72,134.15 ; 652.7,134.8 778.37,134.8 ; 653.35,135.45 778.37,135.45 ; 653.35,136.1 778.37,136.1 ; 653.35,136.75 778.37,136.75 ; 653.35,137.4 779.02,137.4 ; 653.35,138.05 779.02,138.05 ; 654,138.7 779.02,138.7 ; 654,139.35 779.02,139.35 ; 654,140 779.02,140 ; 654,140.65 779.67,140.65 ; 654.65,141.3 779.67,141.3 ; 654.65,141.95 779.67,141.95 ; 654.65,142.6 779.67,142.6 ; 654.65,143.25 779.67,143.25 ; 654.65,143.9 780.32,143.9 ; 655.3,144.55 780.32,144.55 ; 655.3,145.2 780.32,145.2 ; 655.3,145.85 780.32,145.85 ; 655.3,146.5 780.97,146.5 ; 655.3,147.15 780.97,147.15 ; 655.95,147.8 780.97,147.8 ; 655.95,148.45 780.97,148.45 ; 655.95,149.1 780.97,149.1 ; 655.95,149.75 781.62,149.75 ; 656.6,150.4 781.62,150.4 ; 656.6,151.05 781.62,151.05 ; 656.6,151.7 781.62,151.7 ; 656.6,152.35 781.62,152.35 ; 656.6,153 782.27,153 ; 657.25,153.65 782.27,153.65 ; 657.25,154.3 782.27,154.3 ; 657.25,154.95 782.27,154.95 ; 657.25,155.6 782.92,155.6 ; 657.25,156.25 782.92,156.25 ; 657.9,156.9 782.92,156.9 ; 657.9,157.55 782.92,157.55 ; 657.9,158.2 782.92,158.2 ; 657.9,158.85 783.57,158.85 ; 658.55,159.5 783.57,159.5 ; 658.55,160.15 783.57,160.15 ; 658.55,160.8 783.57,160.8 ; 658.55,161.45 783.57,161.45 ; 658.55,162.1 784.22,162.1 ; 659.2,162.75 784.22,162.75 ; 659.2,163.4 784.22,163.4 ; 659.2,164.05 784.22,164.05 ; 659.2,164.7 784.87,164.7 ; 659.2,165.35 784.87,165.35 ; 659.85,166 784.87,166 ; 659.85,166.65 784.87,166.65 ; 659.85,167.3 784.87,167.3 ; 659.85,167.95 785.52,167.95 ; 660.5,168.6 785.52,168.6 ; 660.5,169.25 785.52,169.25 ; 660.5,169.9 785.52,169.9 ; 660.5,170.55 785.52,170.55 ; 660.5,171.2 786.17,171.2 ; 661.15,171.85 786.17,171.85 ; 661.15,172.5 786.17,172.5 ; 661.15,173.15 786.17,173.15 ; 661.15,173.8 786.82,173.8 ; 661.8,174.45 786.82,174.45 ; 661.8,175.1 786.82,175.1 ; 661.8,175.75 786.82,175.75 ; 661.8,176.4 786.82,176.4 ; 661.8,177.05 787.47,177.05 ; 662.45,177.7 787.47,177.7 ; 662.45,178.35 787.47,178.35 ; 662.45,179 787.47,179 ; 662.45,179.65 787.47,179.65 ; 662.45,180.3 788.12,180.3 ; 663.1,180.95 788.12,180.95 ; 663.1,181.6 788.12,181.6 ; 663.1,182.25 788.12,182.25 ; 663.1,182.9 788.77,182.9 ; 663.75,183.55 788.77,183.55 ; 663.75,184.2 788.77,184.2 ; 663.75,184.85 788.77,184.85 ; 663.75,185.5 788.77,185.5 ; 663.75,186.15 789.42,186.15 ; 664.4,186.8 789.42,186.8 ; 664.4,187.45 789.42,187.45 ; 664.4,188.1 789.42,188.1 ; 664.4,188.75 789.42,188.75 ; 664.4,189.4 790.07,189.4 ; 665.05,190.05 790.07,190.05 ; 665.05,190.7 790.07,190.7 ; 665.05,191.35 790.07,191.35 ; 665.05,192 790.72,192 ; 665.7,192.65 790.72,192.65 ; 665.7,193.3 790.72,193.3 ; 665.7,193.95 790.72,193.95 ; 665.7,194.6 790.72,194.6 ; 665.7,195.25 791.37,195.25 ; 666.35,195.9 791.37,195.9 ; 666.35,196.55 791.37,196.55 ; 666.35,197.2 791.37,197.2 ; 666.35,197.85 791.37,197.85 ; 666.35,198.5 792.02,198.5 ; 667,199.15 792.02,199.15 ; 667,199.8 792.02,199.8 ; 667,200.45 792.02,200.45 ; 667,201.1 792.67,201.1 ; 667.65,201.75 792.67,201.75 ; 667.65,202.4 792.67,202.4 ; 667.65,203.05 792.67,203.05 ; 667.65,203.7 792.67,203.7 ; 667.65,204.35 793.32,204.35 ; 668.3,205 793.32,205 ; 668.3,205.65 793.32,205.65 ; 668.3,206.3 793.32,206.3 ; 668.3,206.95 793.32,206.95 ; 668.3,207.6 793.97,207.6 ; 668.95,208.25 793.97,208.25 ; 668.95,208.9 793.97,208.9 ; 668.95,209.55 793.97,209.55 ; 668.95,210.2 794.62,210.2 ; 669.6,210.85 794.62,210.85 ; 669.6,211.5 794.62,211.5 ; 669.6,212.15 794.62,212.15 ; 669.6,212.8 794.62,212.8 ; 669.6,213.45 795.27,213.45 ; 670.25,214.1 795.27,214.1 ; 670.25,214.75 795.27,214.75 ; 670.25,215.4 795.27,215.4 ; 670.25,216.05 795.27,216.05 ; 670.25,216.7 795.92,216.7 ; 670.9,217.35 795.92,217.35 ; 670.9,218 795.92,218 ; 670.9,218.65 795.92,218.65 ; 670.9,219.3 796.57,219.3 ; 671.55,219.95 796.57,219.95 ; 671.55,220.6 796.57,220.6 ; 671.55,221.25 796.57,221.25 ; 671.55,221.9 796.57,221.9 ; 671.55,222.55 797.22,222.55 ; 672.2,223.2 797.22,223.2 ; 720.95,50.95 760.17,50.95 ; 720.95,51.6 760.17,51.6 ; 721.6,52.25 760.17,52.25 ; 721.6,52.9 760.82,52.9 ; 721.6,53.55 760.82,53.55 ; 721.6,54.2 760.82,54.2 ; 721.6,54.85 760.82,54.85 ; 722.25,55.5 760.82,55.5 ; 722.25,56.15 761.47,56.15 ; 722.25,56.8 761.47,56.8 ; 722.25,57.45 761.47,57.45 ; 722.25,58.1 761.47,58.1 ; 722.9,58.75 762.12,58.75 ; 722.9,59.4 762.12,59.4 ; 722.9,60.05 762.12,60.05 ; 722.9,60.7 762.12,60.7 ; 722.9,61.35 762.12,61.35 ; 723.55,62 762.77,62 ; 723.55,62.65 762.77,62.65 ; 723.55,63.3 762.77,63.3 ; 723.55,63.95 762.77,63.95 ; 724.2,64.6 762.77,64.6 ; 724.2,65.25 763.42,65.25 ; 724.2,65.9 763.42,65.9 ; 724.2,66.55 763.42,66.55 ; 724.2,67.2 763.42,67.2 ; 724.85,67.85 764.07,67.85 ; 724.85,68.5 764.07,68.5 ; 724.85,69.15 764.07,69.15 ; 724.85,69.8 764.07,69.8 ; 724.85,70.45 764.07,70.45 ; 725.5,71.1 764.72,71.1 ; 725.5,71.75 764.72,71.75 ; 725.5,72.4 764.72,72.4 ; 725.5,73.05 764.72,73.05 ; 725.5,73.7 764.72,73.7 ; 726.15,74.35 765.37,74.35 ; 726.15,75 765.37,75 ; 726.15,75.65 765.37,75.65 ; 726.15,76.3 765.37,76.3 ; 726.15,76.95 766.02,76.95 ; 726.8,77.6 766.02,77.6 ; 726.8,78.25 766.02,78.25 ; 726.8,78.9 766.02,78.9 ; 726.8,79.55 766.02,79.55 ; 727.45,80.2 766.67,80.2 ; 727.45,80.85 766.67,80.85 ; 727.45,81.5 766.67,81.5 ; 727.45,82.15 766.67,82.15 ; 727.45,82.8 766.67,82.8 ; 728.1,83.45 767.32,83.45 ; 728.1,84.1 767.32,84.1 ; 728.1,84.75 767.32,84.75 ; 728.1,85.4 767.32,85.4 ; 728.1,86.05 767.97,86.05 ; 728.75,86.7 767.97,86.7 ; 728.75,87.35 767.97,87.35 ; 728.75,88 767.97,88 ; 728.75,88.65 767.97,88.65 ; 728.75,89.3 768.62,89.3 ; 729.4,89.95 768.62,89.95 ; 729.4,90.6 768.62,90.6 ; 729.4,91.25 768.62,91.25 ; 729.4,91.9 768.62,91.9 ; 730.05,92.55 769.27,92.55 ; 815.2,50.95 868.07,50.95 ; 815.85,51.6 868.07,51.6 ; 815.85,52.25 868.07,52.25 ; 815.85,52.9 868.07,52.9 ; 815.85,53.55 868.07,53.55 ; 815.85,54.2 868.72,54.2 ; 816.5,54.85 868.72,54.85 ; 816.5,55.5 868.72,55.5 ; 816.5,56.15 868.72,56.15 ; 816.5,56.8 869.37,56.8 ; 816.5,57.45 869.37,57.45 ; 817.15,58.1 869.37,58.1 ; 817.15,58.75 869.37,58.75 ; 817.15,59.4 869.37,59.4 ; 817.15,60.05 870.02,60.05 ; 817.8,60.7 870.02,60.7 ; 817.8,61.35 870.02,61.35 ; 817.8,62 870.02,62 ; 817.8,62.65 870.02,62.65 ; 817.8,63.3 870.67,63.3 ; 818.45,63.95 870.67,63.95 ; 818.45,64.6 870.67,64.6 ; 818.45,65.25 870.67,65.25 ; 818.45,65.9 871.32,65.9 ; 818.45,66.55 871.32,66.55 ; 819.1,67.2 871.32,67.2 ; 819.1,67.85 871.32,67.85 ; 819.1,68.5 871.32,68.5 ; 819.1,69.15 871.97,69.15 ; 819.75,69.8 871.97,69.8 ; 819.75,70.45 871.97,70.45 ; 819.75,71.1 871.97,71.1 ; 819.75,71.75 871.97,71.75 ; 819.75,72.4 872.62,72.4 ; 820.4,73.05 872.62,73.05 ; 820.4,73.7 872.62,73.7 ; 820.4,74.35 872.62,74.35 ; 820.4,75 873.27,75 ; 821.05,75.65 873.27,75.65 ; 821.05,76.3 873.27,76.3 ; 821.05,76.95 873.27,76.95 ; 821.05,77.6 873.27,77.6 ; 821.05,78.25 873.92,78.25 ; 821.7,78.9 873.92,78.9 ; 821.7,79.55 873.92,79.55 ; 821.7,80.2 873.92,80.2 ; 821.7,80.85 873.92,80.85 ; 821.7,81.5 874.57,81.5 ; 822.35,82.15 874.57,82.15 ; 822.35,82.8 874.57,82.8 ; 822.35,83.45 874.57,83.45 ; 822.35,84.1 875.22,84.1 ; 823,84.75 875.22,84.75 ; 823,85.4 875.22,85.4 ; 823,86.05 875.22,86.05 ; 823,86.7 875.22,86.7 ; 823,87.35 875.87,87.35 ; 823.65,88 875.87,88 ; 823.65,88.65 875.87,88.65 ; 823.65,89.3 875.87,89.3 ; 823.65,89.95 875.87,89.95 ; 823.65,90.6 876.52,90.6 ; 824.3,91.25 876.52,91.25 ; 824.3,91.9 876.52,91.9 ; 824.3,92.55 876.52,92.55 ; 824.3,93.2 877.17,93.2 ; 824.95,93.85 877.17,93.85 ; 824.95,94.5 877.17,94.5 ; 824.95,95.15 877.17,95.15 ; 824.95,95.8 877.17,95.8 ; 824.95,96.45 877.82,96.45 ; 825.6,97.1 877.82,97.1 ; 825.6,97.75 877.82,97.75 ; 825.6,98.4 877.82,98.4 ; 825.6,99.05 878.47,99.05 ; 825.6,99.7 878.47,99.7 ; 826.25,100.35 878.47,100.35 ; 826.25,101 878.47,101 ; 826.25,101.65 878.47,101.65 ; 826.25,102.3 879.12,102.3 ; 826.9,102.95 879.12,102.95 ; 826.9,103.6 879.12,103.6 ; 826.9,104.25 879.12,104.25 ; 826.9,104.9 879.12,104.9 ; 826.9,105.55 879.77,105.55 ; 827.55,106.2 879.77,106.2 ; 827.55,106.85 879.77,106.85 ; 827.55,107.5 879.77,107.5 ; 827.55,108.15 880.42,108.15 ; 827.55,108.8 880.42,108.8 ; 828.2,109.45 880.42,109.45 ; 828.2,110.1 880.42,110.1 ; 828.2,110.75 880.42,110.75 ; 828.2,111.4 881.07,111.4 ; 828.85,112.05 881.07,112.05 ; 828.85,112.7 881.07,112.7 ; 828.85,113.35 881.07,113.35 ; 828.85,114 881.07,114 ; 828.85,114.65 881.72,114.65 ; 829.5,115.3 881.72,115.3 ; 829.5,115.95 881.72,115.95 ; 829.5,116.6 881.72,116.6 ; 829.5,117.25 882.37,117.25 ; 829.5,117.9 882.37,117.9 ; 830.15,118.55 882.37,118.55 ; 830.15,119.2 882.37,119.2 ; 830.15,119.85 882.37,119.85 ; 830.15,120.5 883.02,120.5 ; 830.8,121.15 883.02,121.15 ; 830.8,121.8 883.02,121.8 ; 830.8,122.45 883.02,122.45 ; 830.8,123.1 883.02,123.1 ; 830.8,123.75 883.67,123.75 ; 831.45,124.4 883.67,124.4 ; 831.45,125.05 883.67,125.05 ; 831.45,125.7 883.67,125.7 ; 831.45,126.35 884.32,126.35 ; 831.45,127 884.32,127 ; 832.1,127.65 884.32,127.65 ; 832.1,128.3 884.32,128.3 ; 832.1,128.95 884.32,128.95 ; 832.1,129.6 884.97,129.6 ; 832.75,130.25 884.97,130.25 ; 832.75,130.9 884.97,130.9 ; 832.75,131.55 884.97,131.55 ; 832.75,132.2 884.97,132.2 ; 832.75,132.85 885.62,132.85 ; 833.4,133.5 885.62,133.5 ; 833.4,134.15 885.62,134.15 ; 833.4,134.8 885.62,134.8 ; 833.4,135.45 886.27,135.45 ; 833.4,136.1 886.27,136.1 ; 834.05,136.75 886.27,136.75 ; 834.05,137.4 886.27,137.4 ; 834.05,138.05 886.27,138.05 ; 834.05,138.7 886.92,138.7 ; 834.7,139.35 886.92,139.35 ; 834.7,140 886.92,140 ; 834.7,140.65 886.92,140.65 ; 834.7,141.3 886.92,141.3 ; 834.7,141.95 887.57,141.95 ; 835.35,142.6 887.57,142.6 ; 835.35,143.25 887.57,143.25 ; 835.35,143.9 887.57,143.9 ; 835.35,144.55 888.22,144.55 ; 835.35,145.2 888.22,145.2 ; 836,145.85 888.22,145.85 ; 836,146.5 888.22,146.5 ; 836,147.15 888.22,147.15 ; 836,147.8 888.87,147.8 ; 836.65,148.45 888.87,148.45 ; 836.65,149.1 888.87,149.1 ; 836.65,149.75 888.87,149.75 ; 836.65,150.4 889.52,150.4 ; 836.65,151.05 889.52,151.05 ; 837.3,151.7 889.52,151.7 ; 837.3,152.35 889.52,152.35 ; 837.3,153 889.52,153 ; 837.3,153.65 890.17,153.65 ; 837.3,154.3 890.17,154.3 ; 837.95,154.95 890.17,154.95 ; 837.95,155.6 890.17,155.6 ; 837.95,156.25 890.17,156.25 ; 837.95,156.9 890.82,156.9 ; 838.6,157.55 890.82,157.55 ; 838.6,158.2 890.82,158.2 ; 838.6,158.85 890.82,158.85 ; 838.6,159.5 891.47,159.5 ; 838.6,160.15 891.47,160.15 ; 839.25,160.8 891.47,160.8 ; 839.25,161.45 891.47,161.45 ; 839.25,162.1 891.47,162.1 ; 839.25,162.75 892.12,162.75 ; 839.25,163.4 892.12,163.4 ; 839.9,164.05 892.12,164.05 ; 839.9,164.7 892.12,164.7 ; 839.9,165.35 892.12,165.35 ; 839.9,166 892.77,166 ; 840.55,166.65 892.77,166.65 ; 840.55,167.3 892.77,167.3 ; 840.55,167.95 892.77,167.95 ; 840.55,168.6 893.42,168.6 ; 840.55,169.25 893.42,169.25 ; 841.2,169.9 893.42,169.9 ; 841.2,170.55 893.42,170.55 ; 841.2,171.2 893.42,171.2 ; 841.2,171.85 894.07,171.85 ; 841.2,172.5 894.07,172.5 ; 841.85,173.15 894.07,173.15 ; 841.85,173.8 894.07,173.8 ; 841.85,174.45 894.07,174.45 ; 841.85,175.1 894.72,175.1 ; 842.5,175.75 894.72,175.75 ; 842.5,176.4 894.72,176.4 ; 842.5,177.05 894.72,177.05 ; 842.5,177.7 895.37,177.7 ; 842.5,178.35 895.37,178.35 ; 843.15,179 895.37,179 ; 843.15,179.65 895.37,179.65 ; 843.15,180.3 895.37,180.3 ; 843.15,180.95 896.02,180.95 ; 843.15,181.6 896.02,181.6 ; 843.8,182.25 896.02,182.25 ; 843.8,182.9 896.02,182.9 ; 843.8,183.55 896.02,183.55 ; 843.8,184.2 896.67,184.2 ; 844.45,184.85 896.67,184.85 ; 844.45,185.5 896.67,185.5 ; 844.45,186.15 896.67,186.15 ; 844.45,186.8 897.32,186.8 ; 844.45,187.45 897.32,187.45 ; 845.1,188.1 897.32,188.1 ; 845.1,188.75 897.32,188.75 ; 845.1,189.4 897.32,189.4 ; 845.1,190.05 897.97,190.05 ; 845.1,190.7 897.97,190.7 ; 845.75,191.35 897.97,191.35 ; 845.75,192 897.97,192 ; 845.75,192.65 898.62,192.65 ; 845.75,193.3 898.62,193.3 ; 846.4,193.95 898.62,193.95 ; 846.4,194.6 898.62,194.6 ; 846.4,195.25 898.62,195.25 ; 846.4,195.9 899.27,195.9 ; 846.4,196.55 899.27,196.55 ; 847.05,197.2 899.27,197.2 ; 847.05,197.85 899.27,197.85 ; 847.05,198.5 899.27,198.5 ; 847.05,199.15 899.92,199.15 ; 847.05,199.8 899.92,199.8 ; 847.7,200.45 899.92,200.45 ; 847.7,201.1 899.92,201.1 ; 847.7,201.75 900.57,201.75 ; 847.7,202.4 900.57,202.4 ; 848.35,203.05 900.57,203.05 ; 848.35,203.7 900.57,203.7 ; 848.35,204.35 900.57,204.35 ; 848.35,205 901.22,205 ; 848.35,205.65 901.22,205.65 ; 849,206.3 901.22,206.3 ; 849,206.95 901.22,206.95 ; 849,207.6 901.22,207.6 ; 849,208.25 901.87,208.25 ; 849,208.9 901.87,208.9 ; 849.65,209.55 901.87,209.55 ; 849.65,210.2 901.87,210.2 ; 849.65,210.85 902.52,210.85 ; 849.65,211.5 902.52,211.5 ; 850.3,212.15 902.52,212.15 ; 850.3,212.8 902.52,212.8 ; 850.3,213.45 902.52,213.45 ; 850.3,214.1 903.17,214.1 ; 850.3,214.75 903.17,214.75 ; 850.95,215.4 903.17,215.4 ; 850.95,216.05 903.17,216.05 ; 850.95,216.7 903.17,216.7 ; 850.95,217.35 903.82,217.35 ; 850.95,218 903.82,218 ; 851.6,218.65 903.82,218.65 ; 851.6,219.3 903.82,219.3 ; 851.6,219.95 904.47,219.95 ; 851.6,220.6 904.47,220.6 ; 852.25,221.25 904.47,221.25 ; 852.25,221.9 904.47,221.9 ; 852.25,222.55 904.47,222.55 ; 852.25,223.2 905.12,223.2 ; 919.2,50.95 982.47,50.95 ; 919.2,51.6 982.47,51.6 ; 919.2,52.25 982.47,52.25 ; 919.85,52.9 981.82,52.9 ; 919.85,53.55 981.82,53.55 ; 919.85,54.2 981.17,54.2 ; 919.85,54.85 981.17,54.85 ; 919.85,55.5 980.52,55.5 ; 920.5,56.15 980.52,56.15 ; 920.5,56.8 980.52,56.8 ; 920.5,57.45 979.87,57.45 ; 920.5,58.1 979.87,58.1 ; 921.15,58.75 979.22,58.75 ; 921.15,59.4 979.22,59.4 ; 921.15,60.05 979.22,60.05 ; 921.15,60.7 978.57,60.7 ; 921.15,61.35 978.57,61.35 ; 921.8,62 977.92,62 ; 921.8,62.65 977.92,62.65 ; 921.8,63.3 977.27,63.3 ; 921.8,63.95 977.27,63.95 ; 921.8,64.6 977.27,64.6 ; 922.45,65.25 976.62,65.25 ; 922.45,65.9 976.62,65.9 ; 922.45,66.55 975.97,66.55 ; 922.45,67.2 975.97,67.2 ; 923.1,67.85 975.32,67.85 ; 923.1,68.5 975.32,68.5 ; 923.1,69.15 975.32,69.15 ; 923.1,69.8 974.67,69.8 ; 923.1,70.45 974.67,70.45 ; 923.75,71.1 974.02,71.1 ; 923.75,71.75 974.02,71.75 ; 923.75,72.4 973.37,72.4 ; 923.75,73.05 973.37,73.05 ; 923.75,73.7 973.37,73.7 ; 924.4,74.35 972.72,74.35 ; 924.4,75 972.72,75 ; 924.4,75.65 972.07,75.65 ; 924.4,76.3 972.07,76.3 ; 925.05,76.95 971.42,76.95 ; 925.05,77.6 971.42,77.6 ; 925.05,78.25 971.42,78.25 ; 925.05,78.9 970.77,78.9 ; 925.05,79.55 970.77,79.55 ; 925.7,80.2 970.12,80.2 ; 925.7,80.85 970.12,80.85 ; 925.7,81.5 969.47,81.5 ; 925.7,82.15 969.47,82.15 ; 925.7,82.8 969.47,82.8 ; 926.35,83.45 968.82,83.45 ; 926.35,84.1 968.82,84.1 ; 926.35,84.75 968.17,84.75 ; 926.35,85.4 968.17,85.4 ; 927,86.05 967.52,86.05 ; 927,86.7 967.52,86.7 ; 927,87.35 967.52,87.35 ; 927,88 966.87,88 ; 927,88.65 966.87,88.65 ; 927.65,89.3 966.22,89.3 ; 927.65,89.95 966.22,89.95 ; 927.65,90.6 965.57,90.6 ; 927.65,91.25 965.57,91.25 ; 927.65,91.9 965.57,91.9 ; 928.3,92.55 964.92,92.55 ; 928.3,93.2 964.92,93.2 ; 928.3,93.85 964.27,93.85 ; 928.3,94.5 964.27,94.5 ; 928.95,95.15 963.62,95.15 ; 928.95,95.8 963.62,95.8 ; 928.95,96.45 963.62,96.45 ; 928.95,97.1 962.97,97.1 ; 928.95,97.75 962.97,97.75 ; 929.6,98.4 962.32,98.4 ; 929.6,99.05 962.32,99.05 ; 929.6,99.7 961.67,99.7 ; 929.6,100.35 961.67,100.35 ; 929.6,101 961.67,101 ; 930.25,101.65 961.02,101.65 ; 930.25,102.3 961.02,102.3 ; 930.25,102.95 960.37,102.95 ; 930.25,103.6 960.37,103.6 ; 930.9,104.25 959.72,104.25 ; 930.9,104.9 959.72,104.9 ; 930.9,105.55 959.72,105.55 ; 930.9,106.2 959.07,106.2 ; 930.9,106.85 959.07,106.85 ; 931.55,107.5 958.42,107.5 ; 931.55,108.15 958.42,108.15 ; 931.55,108.8 957.77,108.8 ; 931.55,109.45 957.77,109.45 ; 931.55,110.1 957.77,110.1 ; 932.2,110.75 957.12,110.75 ; 932.2,111.4 957.12,111.4 ; 932.2,112.05 956.47,112.05 ; 932.2,112.7 956.47,112.7 ; 932.85,113.35 955.82,113.35 ; 932.85,114 955.82,114 ; 932.85,114.65 955.82,114.65 ; 932.85,115.3 955.17,115.3 ; 932.85,115.95 955.17,115.95 ; 933.5,116.6 954.52,116.6 ; 933.5,117.25 954.52,117.25 ; 933.5,117.9 954.52,117.9 ; 933.5,118.55 953.87,118.55 ; 933.5,119.2 953.87,119.2 ; 934.15,119.85 953.22,119.85 ; 934.15,120.5 953.22,120.5 ; 934.15,121.15 952.57,121.15 ; 934.15,121.8 952.57,121.8 ; 934.8,122.45 952.57,122.45 ; 934.8,123.1 951.92,123.1 ; 934.8,123.75 951.92,123.75 ; 934.8,124.4 951.27,124.4 ; 934.8,125.05 951.27,125.05 ; 935.45,125.7 950.62,125.7 ; 935.45,126.35 950.62,126.35 ; 935.45,127 950.62,127 ; 935.45,127.65 949.97,127.65 ; 935.45,128.3 949.97,128.3 ; 936.1,128.95 949.32,128.95 ; 936.1,129.6 949.32,129.6 ; 936.1,130.25 948.67,130.25 ; 936.1,130.9 948.67,130.9 ; 936.75,131.55 948.67,131.55 ; 936.75,132.2 948.02,132.2 ; 936.75,132.85 948.02,132.85 ; 936.75,133.5 947.37,133.5 ; 936.75,134.15 947.37,134.15 ; 937.4,134.8 946.72,134.8 ; 937.4,135.45 946.72,135.45 ; 937.4,136.1 946.72,136.1 ; 937.4,136.75 946.07,136.75 ; 937.4,137.4 946.07,137.4 ; 938.05,138.05 945.42,138.05 ; 938.05,138.7 945.42,138.7 ; 938.05,139.35 944.77,139.35 ; 938.05,140 944.77,140 ; 938.7,140.65 944.77,140.65 ; 938.7,141.3 944.12,141.3 ; 938.7,141.95 944.12,141.95 ; 938.7,142.6 943.47,142.6 ; 938.7,143.25 943.47,143.25 ; 939.35,143.9 942.82,143.9 ; 939.35,144.55 942.82,144.55 ; 939.35,145.2 942.82,145.2 ; 939.35,145.85 942.17,145.85 ; 939.35,146.5 942.17,146.5 ; 940,147.15 941.52,147.15 ; 940,147.8 941.52,147.8 ; 940,148.45 940.87,148.45 ; 940,149.1 940.87,149.1 ; 940.65,149.75 940.87,149.75 ; 956.25,222.55 1019.52,222.55 ; 956.25,223.2 1019.52,223.2 ; 956.9,221.25 1019.52,221.25 ; 956.9,221.9 1019.52,221.9 ; 957.55,219.95 1018.87,219.95 ; 957.55,220.6 1019.52,220.6 ; 958.2,218 1018.87,218 ; 958.2,218.65 1018.87,218.65 ; 958.2,219.3 1018.87,219.3 ; 958.85,216.7 1018.22,216.7 ; 958.85,217.35 1018.87,217.35 ; 959.5,214.75 1018.22,214.75 ; 959.5,215.4 1018.22,215.4 ; 959.5,216.05 1018.22,216.05 ; 960.15,213.45 1017.57,213.45 ; 960.15,214.1 1017.57,214.1 ; 960.8,212.15 1017.57,212.15 ; 960.8,212.8 1017.57,212.8 ; 961.45,210.2 1016.92,210.2 ; 961.45,210.85 1016.92,210.85 ; 961.45,211.5 1017.57,211.5 ; 962.1,208.9 1016.92,208.9 ; 962.1,209.55 1016.92,209.55 ; 962.75,207.6 1016.27,207.6 ; 962.75,208.25 1016.92,208.25 ; 963.4,205.65 1016.27,205.65 ; 963.4,206.3 1016.27,206.3 ; 963.4,206.95 1016.27,206.95 ; 964.05,204.35 1015.62,204.35 ; 964.05,205 1015.62,205 ; 964.7,203.05 1015.62,203.05 ; 964.7,203.7 1015.62,203.7 ; 965.35,201.1 1014.97,201.1 ; 965.35,201.75 1014.97,201.75 ; 965.35,202.4 1015.62,202.4 ; 966,199.8 1014.97,199.8 ; 966,200.45 1014.97,200.45 ; 966.65,198.5 1014.32,198.5 ; 966.65,199.15 1014.32,199.15 ; 967.3,196.55 1014.32,196.55 ; 967.3,197.2 1014.32,197.2 ; 967.3,197.85 1014.32,197.85 ; 967.95,195.25 1013.67,195.25 ; 967.95,195.9 1013.67,195.9 ; 968.6,193.3 1013.67,193.3 ; 968.6,193.95 1013.67,193.95 ; 968.6,194.6 1013.67,194.6 ; 969.25,192 1013.02,192 ; 969.25,192.65 1013.02,192.65 ; 969.9,190.7 1013.02,190.7 ; 969.9,191.35 1013.02,191.35 ; 970.55,188.75 1012.37,188.75 ; 970.55,189.4 1012.37,189.4 ; 970.55,190.05 1012.37,190.05 ; 971.2,187.45 1012.37,187.45 ; 971.2,188.1 1012.37,188.1 ; 971.85,186.15 1011.72,186.15 ; 971.85,186.8 1011.72,186.8 ; 972.5,184.2 1011.72,184.2 ; 972.5,184.85 1011.72,184.85 ; 972.5,185.5 1011.72,185.5 ; 973.15,182.9 1011.07,182.9 ; 973.15,183.55 1011.07,183.55 ; 973.8,181.6 1011.07,181.6 ; 973.8,182.25 1011.07,182.25 ; 974.45,179.65 1010.42,179.65 ; 974.45,180.3 1010.42,180.3 ; 974.45,180.95 1010.42,180.95 ; 975.1,178.35 1010.42,178.35 ; 975.1,179 1010.42,179 ; 975.75,176.4 1009.77,176.4 ; 975.75,177.05 1009.77,177.05 ; 975.75,177.7 1009.77,177.7 ; 976.4,175.1 1009.77,175.1 ; 976.4,175.75 1009.77,175.75 ; 977.05,173.8 1009.12,173.8 ; 977.05,174.45 1009.12,174.45 ; 977.7,171.85 1008.47,171.85 ; 977.7,172.5 1009.12,172.5 ; 977.7,173.15 1009.12,173.15 ; 978.35,170.55 1008.47,170.55 ; 978.35,171.2 1008.47,171.2 ; 979,169.25 1008.47,169.25 ; 979,169.9 1008.47,169.9 ; 979.65,167.3 1007.82,167.3 ; 979.65,167.95 1007.82,167.95 ; 979.65,168.6 1007.82,168.6 ; 980.3,166 1007.17,166 ; 980.3,166.65 1007.82,166.65 ; 980.95,164.7 1007.17,164.7 ; 980.95,165.35 1007.17,165.35 ; 981.6,162.75 1006.52,162.75 ; 981.6,163.4 1007.17,163.4 ; 981.6,164.05 1007.17,164.05 ; 982.25,161.45 1006.52,161.45 ; 982.25,162.1 1006.52,162.1 ; 982.9,159.5 1005.87,159.5 ; 982.9,160.15 1006.52,160.15 ; 982.9,160.8 1006.52,160.8 ; 983.55,158.2 1005.87,158.2 ; 983.55,158.85 1005.87,158.85 ; 984.2,156.9 1005.22,156.9 ; 984.2,157.55 1005.87,157.55 ; 984.85,154.95 1005.22,154.95 ; 984.85,155.6 1005.22,155.6 ; 984.85,156.25 1005.22,156.25 ; 985.5,153.65 1004.57,153.65 ; 985.5,154.3 1005.22,154.3 ; 986.15,152.35 1004.57,152.35 ; 986.15,153 1004.57,153 ; 986.8,150.4 1003.92,150.4 ; 986.8,151.05 1004.57,151.05 ; 986.8,151.7 1004.57,151.7 ; 987.45,149.1 1003.92,149.1 ; 987.45,149.75 1003.92,149.75 ; 988.1,147.8 1003.27,147.8 ; 988.1,148.45 1003.92,148.45 ; 988.75,145.85 1003.27,145.85 ; 988.75,146.5 1003.27,146.5 ; 988.75,147.15 1003.27,147.15 ; 989.4,144.55 1002.62,144.55 ; 989.4,145.2 1003.27,145.2 ; 990.05,143.25 1002.62,143.25 ; 990.05,143.9 1002.62,143.9 ; 990.7,141.3 1001.97,141.3 ; 990.7,141.95 1002.62,141.95 ; 990.7,142.6 1002.62,142.6 ; 991.35,140 1001.97,140 ; 991.35,140.65 1001.97,140.65 ; 992,138.05 1001.32,138.05 ; 992,138.7 1001.32,138.7 ; 992,139.35 1001.97,139.35 ; 992.65,136.75 1001.32,136.75 ; 992.65,137.4 1001.32,137.4 ; 993.3,135.45 1000.67,135.45 ; 993.3,136.1 1001.32,136.1 ; 993.95,133.5 1000.67,133.5 ; 993.95,134.15 1000.67,134.15 ; 993.95,134.8 1000.67,134.8 ; 994.6,132.2 1000.02,132.2 ; 994.6,132.85 1000.02,132.85 ; 995.25,130.9 1000.02,130.9 ; 995.25,131.55 1000.02,131.55 ; 995.9,128.95 999.37,128.95 ; 995.9,129.6 999.37,129.6 ; 995.9,130.25 1000.02,130.25 ; 996.55,127.65 999.37,127.65 ; 996.55,128.3 999.37,128.3 ; 997.2,126.35 998.72,126.35 ; 997.2,127 999.37,127 ; 997.85,124.4 998.72,124.4 ; 997.85,125.05 998.72,125.05 ; 997.85,125.7 998.72,125.7 ; 1034.25,50.95 1068.92,50.95 ; 1034.25,51.6 1069.57,51.6 ; 1034.25,52.25 1070.22,52.25 ; 1034.25,52.9 1070.22,52.9 ; 1034.9,53.55 1070.87,53.55 ; 1034.9,54.2 1071.52,54.2 ; 1034.9,54.85 1072.17,54.85 ; 1034.9,55.5 1072.82,55.5 ; 1035.55,56.15 1073.47,56.15 ; 1035.55,56.8 1074.12,56.8 ; 1035.55,57.45 1074.77,57.45 ; 1035.55,58.1 1075.42,58.1 ; 1035.55,58.75 1076.07,58.75 ; 1036.2,59.4 1076.72,59.4 ; 1036.2,60.05 1077.37,60.05 ; 1036.2,60.7 1077.37,60.7 ; 1036.2,61.35 1078.02,61.35 ; 1036.85,62 1078.67,62 ; 1036.85,62.65 1079.32,62.65 ; 1036.85,63.3 1079.97,63.3 ; 1036.85,63.95 1080.62,63.95 ; 1036.85,64.6 1081.27,64.6 ; 1037.5,65.25 1081.92,65.25 ; 1037.5,65.9 1082.57,65.9 ; 1037.5,66.55 1083.22,66.55 ; 1037.5,67.2 1083.87,67.2 ; 1037.5,67.85 1084.52,67.85 ; 1038.15,68.5 1084.52,68.5 ; 1038.15,69.15 1085.17,69.15 ; 1038.15,69.8 1085.82,69.8 ; 1038.15,70.45 1086.47,70.45 ; 1038.8,71.1 1087.12,71.1 ; 1038.8,71.75 1087.77,71.75 ; 1038.8,72.4 1088.42,72.4 ; 1038.8,73.05 1089.07,73.05